# Altium PCB ECEN5730_board1.PcbDoc
Units mil, origin at the board's own origin, x right, y up, seen from the top; angles counter-clockwise.
Board outline 3500 x 2000 mil, 2 copper layers (Top Layer, Bottom Layer), stack 61.756 mil thick; 23 components, 12 nets, 61 pads, 13 vias.
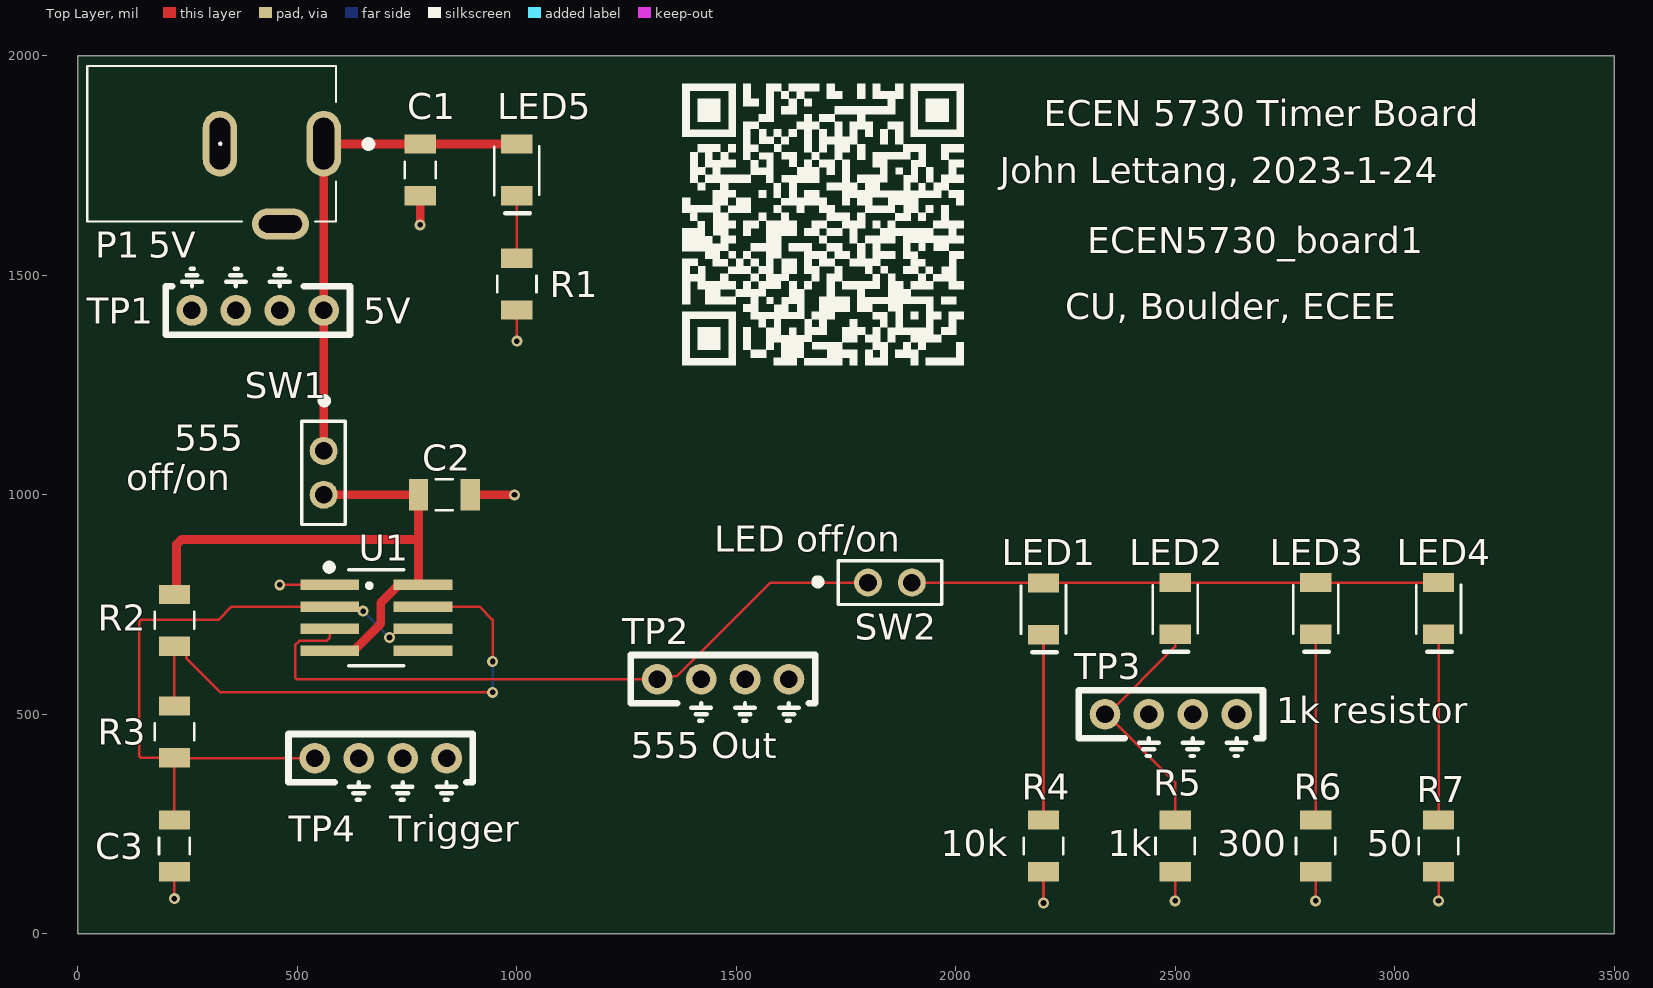
[diagram p0: Top Layer view]
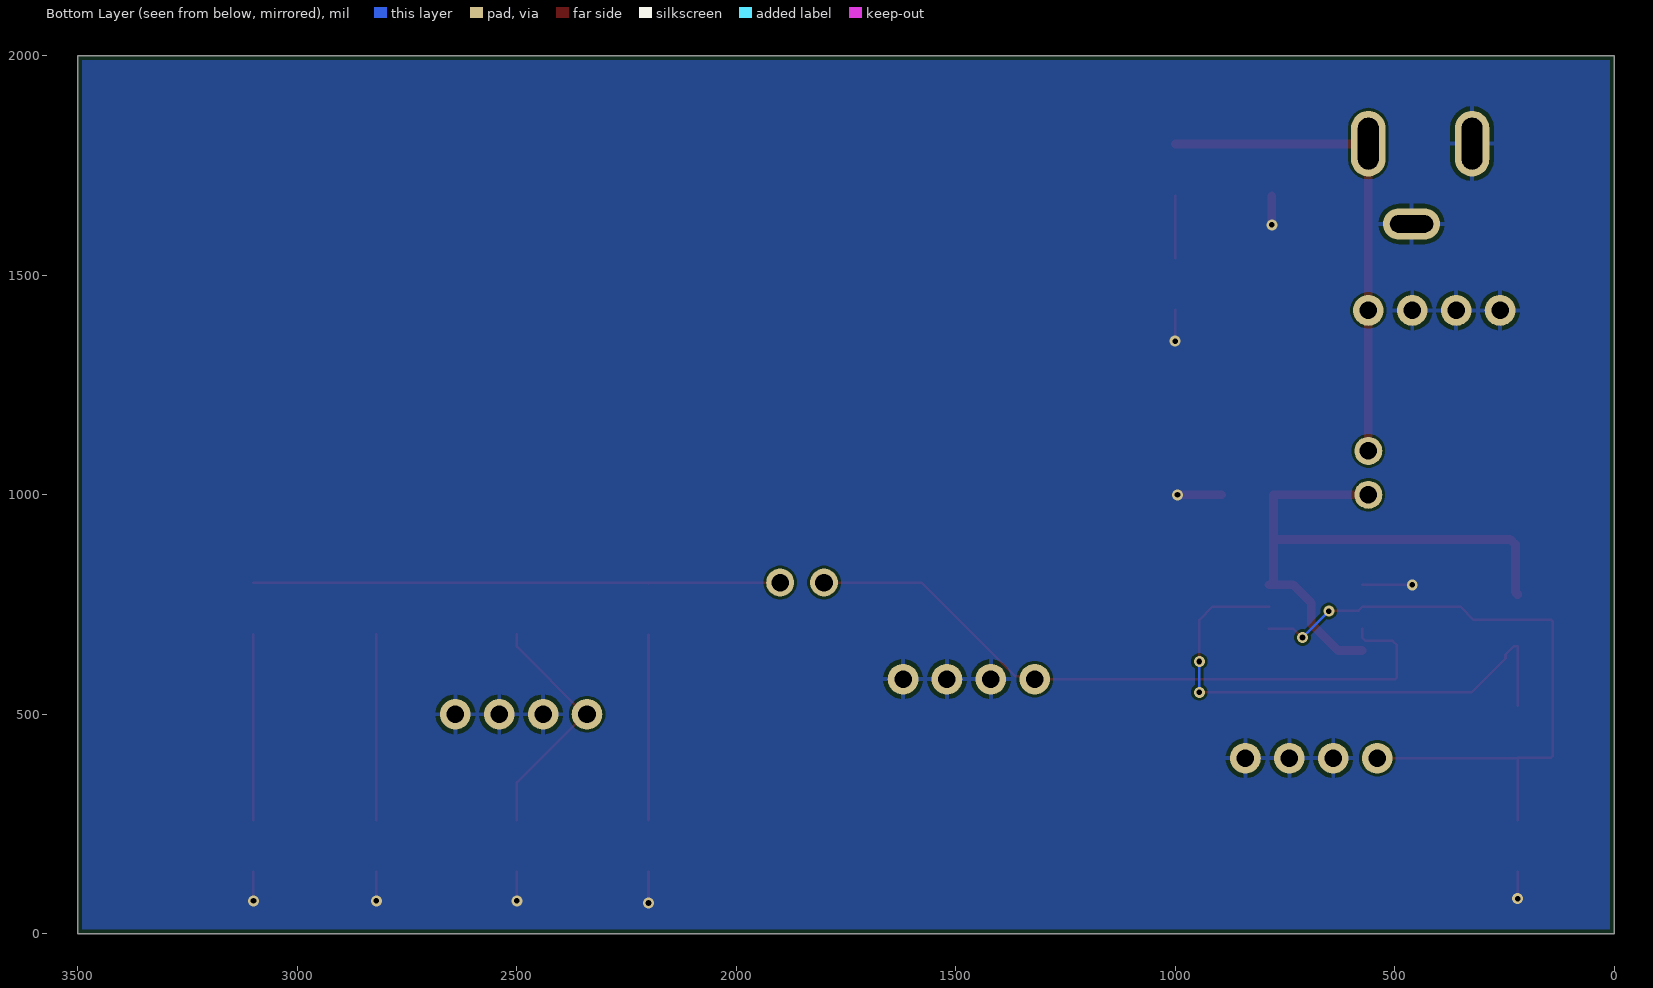
[diagram p1: Bottom Layer view, seen from below]
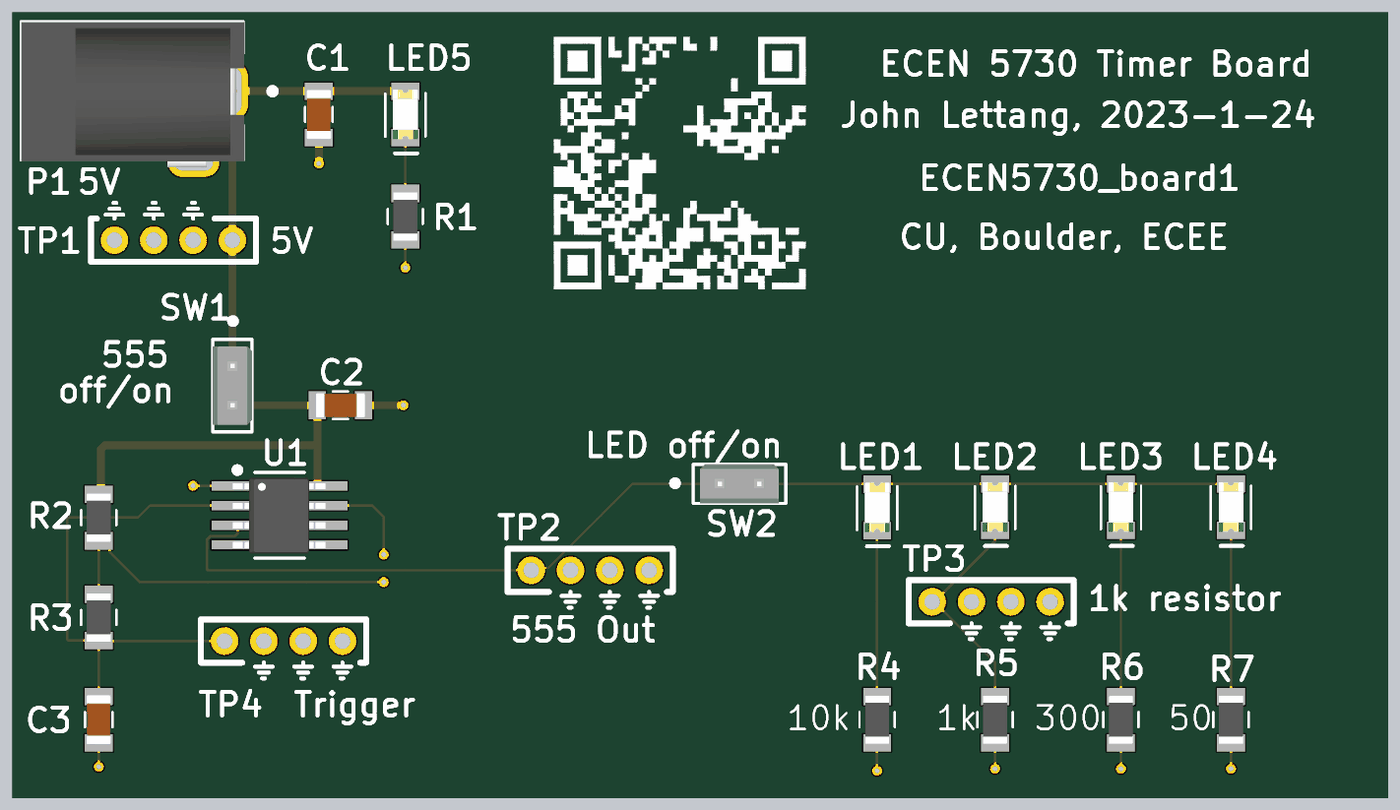
[diagram p2: 3D render of the assembled board from above, using the file's embedded part models]

## Layer stack, top to bottom
Top Solder: solder mask 1, SM-001, Dk 4
Top Layer: signal copper 1.378
Dielectric 1: core 59, Core-043, Dk 4.3
Bottom Layer: signal copper 1.378
Bottom Solder: solder mask 1, SM-001, Dk 4

## Board outline
0,0 3500,0 3500,2000 0,2000

## Design rules (kind name [scope] priority, off if disabled: settings)
BoardOutlineClearance [All] p1: gap=10 ignorepadtopadclearanceinfootprint=FALSE except(0: Arc-SplitContinuation Track-SplitContinuation SMDPad-SplitContinuation THPad-SplitContinuation Via-SplitContinuation Fill-SplitContinuation Poly-SplitContinuation Region-SplitContinuation Text-SplitContinuation)
Clearance [All] p1: gap=6 ignorepadtopadclearanceinfootprint=FALSE
PlaneClearance [All] p1: clearance=10
PlaneConnect [All] p1: planeconnectstyle=Direct reliefexpansion=20 reliefentries=4 reliefconductorwidth=10 reliefairgap=10
PolygonConnect [All] p1: thpad.connectstyle=Relief thpad.reliefconductorwidth=10 thpad.reliefentries=4 thpad.polygonreliefangle="90 Angle" thpad.airgapwidth=10 smdpad.connectstyle=Direct smdpad.reliefconductorwidth=10 smdpad.reliefentries=4 smdpad.polygonreliefangle="90 Angle" smdpad.airgapwidth=10 via.connectstyle=Direct via.reliefconductorwidth=10 via.reliefentries=4 via.polygonreliefangle="90 Angle" via.airgapwidth=10
RoutingVias [All] p1: holewidth=13 width=25 viastyle="Through Hole" minholewidth=13 minwidth=25 maxholewidth=60 maxwidth=80
SolderMaskExpansion [All] p1: expansion=4 istentingtop=FALSE
UnRoutedNet [All] p1: checkbadconnections=TRUE
Width "Schematic Width Constraint_1" [InNet('5V 555')] p1: maxlimit=100 minlimit=10 preferedwidth=20 minimp=50.000000 maximp=50.000000 favimp=50.000000
Width "Schematic Width Constraint" [InNet('+5')] p2: maxlimit=100 minlimit=10 preferedwidth=20 minimp=50.000000 maximp=50.000000 favimp=50.000000
Width [All] p3: maxlimit=100 minlimit=6 preferedwidth=6 minimp=50.000000 maximp=50.000000 favimp=50.000000
27 further rules are at their usual default settings.

## Components (designator, comment, footprint, x,y, rotation, side; value= is the part's Value field where it differs from the comment)
C1 "22uF" 1206_Passive_Capacitor 780,1740 r90 top
C2 "22uF" 1206_Passive_Capacitor 835,1000 r180 top
C3 "1uF" 1206_Passive_Capacitor 220,200 r90 top
LED1 "Blue" LED_1206 2200,740 r270 top
LED2 "Blue" LED_1206 2500,741 r270 top
LED3 "Blue" LED_1206 2820,741 r270 top
LED4 "Blue" LED_1206 3100,741 r270 top
LED5 "Red" LED_1206 1000,1740 r270 top
P1 "Power Jack" Power_Jack 560,1800 r180 top value="CONN PWR JACK 2X5.5MM SOLDER"
R1 "1k" 1206_Passive_Resitor 1000,1480 r90 top value="1K Ohm"
R2 "1k" 1206_Passive_Resitor 220,714 r90 top value="1K Ohm"
R3 "1k" 1206_Passive_Resitor 220,460 r90 top value="1K Ohm"
R4 "10k" 1206_Passive_Resitor 2200,200 r90 top value=10KOhm
R5 "1k" 1206_Passive_Resitor 2500,200 r90 top value="1K Ohm"
R6 "300 Ohm" 1206_Passive_Resitor 2820,200 r90 top value=300Ohm
R7 "47 Ohms" 1206_Passive_Resitor 3100,200 r90 top value=47Ohm
SW1 "SW 555" 2Pin-Header-Conn 560,1100 r270 top
SW2 "SW LEDs" 2Pin-Header-Conn 1800,800 r0 top
TP1 "TP_5V" TP10x_Probe 410,1420 r180 top
TP2 "TP 555 Out" TP10x_Probe 1470,580 r0 top
TP3 "TP 1K LED" TP10x_Probe 2490,500 r0 top
TP4 "TP Trig" TP10x_Probe 690,400 r0 top
U1 "NE555DR" TS555IDTTR 680,720 r0 top

## Footprints (in the part's own frame and the unit in brackets; to place one, negate y for a bottom-side part, rotate by r counter-clockwise, add the part's x,y. Pads: shape width x height; smd on the part's side, far side on the other; paste and mask are expansions set on the pad)
2Pin-Header-Conn [mm]
  round 1.62 hole 1.02: 1(0,0) 2(2.54,0)
  silkscreen extent -3.03,-1.27 4.26,1.26, body extent -1.27,-1.27 3.81,1.27, height 8.13
1206_Passive_Capacitor [mil]
  rect 44x71 smd: 1(-59,0) 2(59,0)
  silkscreen extent -19,-35 19,35, body extent -63,-31 63,32, height 50
1206_Passive_Resitor [mil]
  rect 44x71 smd: 1(-59,0) 2(59,0)
  silkscreen extent -19,-45 19,45, body extent -61,-31 61,31, height 26
LED_1206 [mil]
  rect 44x71 smd: 1(-59,0) 2(59,0)
  silkscreen extent -54,-51 99,51, body extent -63,-31 63,31, height 28
Power_Jack [mm]
  oval 2x3.8 hole 1.2 slot 3 at 90 deg: 1(0,0) 2(6,0)
  oval 3.3x1.8 hole 1 slot 2.5 at 0 deg: 3(2.5,4.65)
  silkscreen extent -2.79,-4.5 13.68,4.5, body extent -0.76,-4.45 13.64,4.95, height 11.49
TP10x_Probe [mil] "Small Probs footprint"
  round 70 hole 40: 1(-150,0) 2(-50,0) 2(50,0) 2(150,0)
  silkscreen extent -210,-95 210,55
TS555IDTTR [mm] "IC OSC Single Timer 2.7MHz 8SOIC"
  rect 3.4x0.6 smd: 1(-2.7,1.905) 2(-2.7,0.635) 3(-2.7,-0.635) 4(-2.7,-1.905) 5(2.7,-1.905) 6(2.7,-0.635) 7(2.7,0.635) 8(2.7,1.905)
  silkscreen extent -2.85,-2.77 1.6,3.05, body extent -3.03,-2.48 2.96,2.43, height 1.75

## Part data
C1 C2: library part C_22uF_1206, "22uF ±10% 25V X5R 1206 Multilayer Ceramic Capacitors MLCC - SMD/SMT RoHS", LCSC Part#=C12891, MFR Part #=CL31A226KAHNNNE, Datasheet=https://datasheet.lcsc.com/lcsc/1811031514_Samsung-Electro-Mechanics-CL31A226KAHNNNE_C12891.pdf, Type=basic
C3: library part C_1uF_1206, "MULTILAYER CERAMIC CAPACITORS MLCC - SMD/SMT 1UF 50V 1206 ROHS", LCSC Part#=C1848, MFR Part #=CL31B105KBHNNNE, Digikey Link=https://www.digikey.com/product-detail/en/C1206C105M4RACTU/399-8150-1-ND/3471873/?itemSeq=304982366, Type=Basic
LED1 LED2 LED3 LED4: library part LED_BLUE_1206, "blue 1206  Light Emitting Diodes (LED) ROHS", LCSC Part#=C130717, MFR Part #=NCD1206B1, Datasheet=https://datasheet.lcsc.com/lcsc/2008201033_Foshan-NationStar-Optoelectronics-NCD1206B1_C130717.pdf, Type=Extended
LED5: library part LED_RED_1206, "Red 621~631nm 1206 Light Emitting Diodes (LED) RoHS", LCSC Part#=C93133, MFR Part #=15-21/R6C-FQ1R1B/2T, Datasheet=https://datasheet.lcsc.com/szlcsc/1811151241_Everlight-Elec-15-21-R6C-FQ1R1B-2T_C93133.pdf, Type=Extended
P1: library part "P_Power Jack", "Power Barrel Connector Jack 2.10mm ID (0.083\"), 5.50mm OD (0.217\") Through Hole, Right Angle", LCSC Part#=C136744, MFR Part #=PJ-102A, Digikey Link=https://www.digikey.com/product-detail/en/PJ-102A/CP-102A-ND/275425/?itemSeq=304982367, Type=Extended
R1 R2 R3 R5: library part R_1K_1206, "CHIP RESISTOR - SURFACE MOUNT 1KOHMS ±1% 1/4W 1206 ROHS", LCSC Part#=C4410, MFR Part #=RNCP1206FTD1K00CT, Digikey Link=https://www.digikey.com/product-detail/en/RNCP1206FTD1K00/RNCP1206FTD1K00CT-ND/2240675/?itemSeq=304982373, Type=Basic
R4: library part R_10KOhm_1206, "10 kOhms ±5% 0.25W, 1/4W Chip Resistor 1206 (3216 Metric) Automotive AEC-Q200 Thick Film", LCSC Part#=C17902, MFR Part #=RMCF1206FT10K0, Digikey Link=https://www.digikey.com/en/products/detail/stackpole-electronics-inc/RMCF1206FT10K0/1759669, Type=Basic
R6: library part R_300Ohm_1206, "CHIP RESISTOR - SURFACE MOUNT 300OHMS ±1% 1/4W 1206 ROHS", LCSC Part#=C17887, MFR Part #=1206W4F3000T5E, Datasheet=https://datasheet.lcsc.com/szlcsc/Uniroyal-Elec-1206W4F3000T5E_C17887.pdf, Type=Basic
R7: library part R_47Ohm_1206, "47Ω ±5% 0.25W ±200ppm/℃ 1206 Chip Resistor - Surface Mount RoHS", LCSC Part#=C25384, MFR Part #=1206W4J0470T5E, Datasheet=https://datasheet.lcsc.com/lcsc/1811101020_UNI-ROYAL-Uniroyal-Elec-1206W4J0470T5E_C25384.pdf, Type=Extended
SW1 SW2: library part SW_2Pin_100mil_Switch, "2Pin Header", LCSC Part#=C124375, Type=Extended
TP1 TP2 TP3 TP4: library part TP_10x_Probe, "Test Point 300 mil centers"
U1: library part U_555_Slow, "555 Timer SOIC-8_150MIL ROHS 150ns Rise Time", LCSC Part#=C7593, Digikey Link=https://www.digikey.com/product-detail/en/texas-instruments/NE555DR/296-6501-1-ND/372490, MFR Part #=NE555DR, Type=Basic

## Via types
v1: diameter 25, hole 13, Top Layer to Bottom Layer, 13 vias

## Nets (pads, with @x,y where several pads share a name; then routed paths per layer and width w, separated by ;. In a path a pad name is that pad's centre, name@x,y a point inside that pad or via, vN(x,y) a via of type N, cw(c..) or ccw(c..) an arc to the next point about the centre after c; other vN are vias at no path point)
"5V 555": C2.2 R2.2 SW1.2 U1.4 U1.8 | length 1396
  Top Layer w20: R2.2 225,778 225,886.69 236.72,898.41 776,898.41 ; SW1.2 C2.2 776,898.41 ; U1.4 628.82,645 690,706.18 690,753.82 731.18,795 U1.8@777.81,795 ; U1.8 U1.8@777.81,795 ; 776,898.41 776,796.81 U1.8@777.81,795
"555 Out": SW2.1 TP2.1 U1.3 | length 1578.1
  Top Layer w6: U1.3 573.7,674.19 566.88,667.36 504.6,667.36 495,657.77 495,583.51 498.51,580 TP2.1 1326.23,586.23 1364,586.23 1577.77,800 SW2.1
+5: C1.2 LED5.1 P1.1 SW1.1 TP1.1 | length 1140.4
  Top Layer w20: SW1.1 TP1.1 P1.1 561,1799 C1.2 LED5.1
D: R2.1 R3.2 U1.7 | length 1245.6
  Top Layer w6: R3.2 R2.1 228.49,655 247.49,636 247.49,627.51 325,550 v1(945,550) ; U1.7 915,745 945,715 v1(945,620)
  Bottom Layer w6: v1(945,550) v1(945,620)
GND: C1.1 C2.1 C3.1 P1.2 P1.3 R1.1 R4.1 R5.1 R6.1 R7.1 TP1.2 TP2.2 TP3.2 TP4.2 U1.1 | length 681.7
  Top Layer w6: v1(220,80) C3.1 ; v1(460,795) U1.1 ; v1(1000,1350) R1.1 ; v1(2200,70) R4.1 ; v1(2500,75) R5.1 ; v1(2820,75) R6.1 ; v1(3100,75) R7.1
  Top Layer w20: v1(780,1615) C1.1 ; C2.1 v1(995,1000)
LEDs: LED1.1 LED2.1 LED3.1 LED4.1 SW2.2 | length 1200.8
  Top Layer w6: SW2.2 2199,800 LED1.1 2201,800 LED2.1 LED3.1 LED4.1
NetLED1_2: LED1.2 R4.2 | length 422
  Top Layer w6: R4.2 LED1.2
NetLED2_2: LED2.2 R5.2 TP3.1 | length 557.1
  Top Layer w6: TP3.1 2346,500 2500,654 LED2.2 ; TP3.1@2344.75,500 2500,344.75 R5.2
NetLED3_2: LED3.2 R6.2 | length 423
  Top Layer w6: R6.2 LED3.2
NetLED4_2: LED4.2 R7.2 | length 423
  Top Layer w6: R7.2 LED4.2
NetLED5_2: LED5.2 R1.2 | length 142
  Top Layer w6: R1.2 LED5.2
Trig: C3.2 R3.1 TP4.1 U1.2 U1.6 | length 1548.3
  Top Layer w6: C3.2 R3.1 ; TP4.1 221,400 R3.1 ; v1(650,735) 648.81,736.19 582.51,736.19 U1.2 350,745 320,715 143.51,715 140,711.49 140,404.51 143.51,401 R3.1 ; v1(710,675) 711.18,675 731.18,695 U1.6
  Bottom Layer w6: v1(650,735) v1(710,675)
pads on no net: U1.5

## Polygon pours and split planes (outlines as drawn)
GND on Bottom Layer "GND_L02_P000" (solid, pour order 0): 0,2000 3500,2000 3500,0 0,0

## Silkscreen, mask and mechanical layers (free items; w line width, h text height)
Top Overlay:
  drawing of 28 lines, arcs and shapes, not listed
  text "ECEN 5730 Timer Board" at 2200,1840 h60
  text "John Lettang, 2023-1-24" at 2100,1709.99 h60
  text "ECEN5730_board1" at 2300,1550 h60
  text "5V" at 160,1540 h60
  text "CU, Boulder, ECEE" at 2250,1399.99 h60
  text "5V" at 650,1390 h60
  text "555" at 220,1100 h60
  text "off/on" at 110,1010 h60
  text "LED off/on" at 1450,870 h60
  text "1k resistor" at 2730,480 h60
  text "555 Out" at 1260,400 h60
  text "Trigger" at 710,209.99 h60
  text "10k" at 1966,176 h60
  text "1k" at 2346,176 h60
  text "300" at 2596,176 h60
  text "50" at 2936,176 h60
Mechanical 1:
  the board outline again, w20